# Altium PCB PCB1.pcbdoc
Units mm, origin at the board's own origin, x right, y up, seen from the top; angles counter-clockwise.
Board outline 107.47 x 61.72 mm, 4 copper layers (Clean Signal Layer, Plain Ground, Power Layer, Bottom Layer), stack 0.603 mm thick; 116 components, 91 nets, 447 pads, 4 vias.
Unrouted connection lines stored in the file: 293.
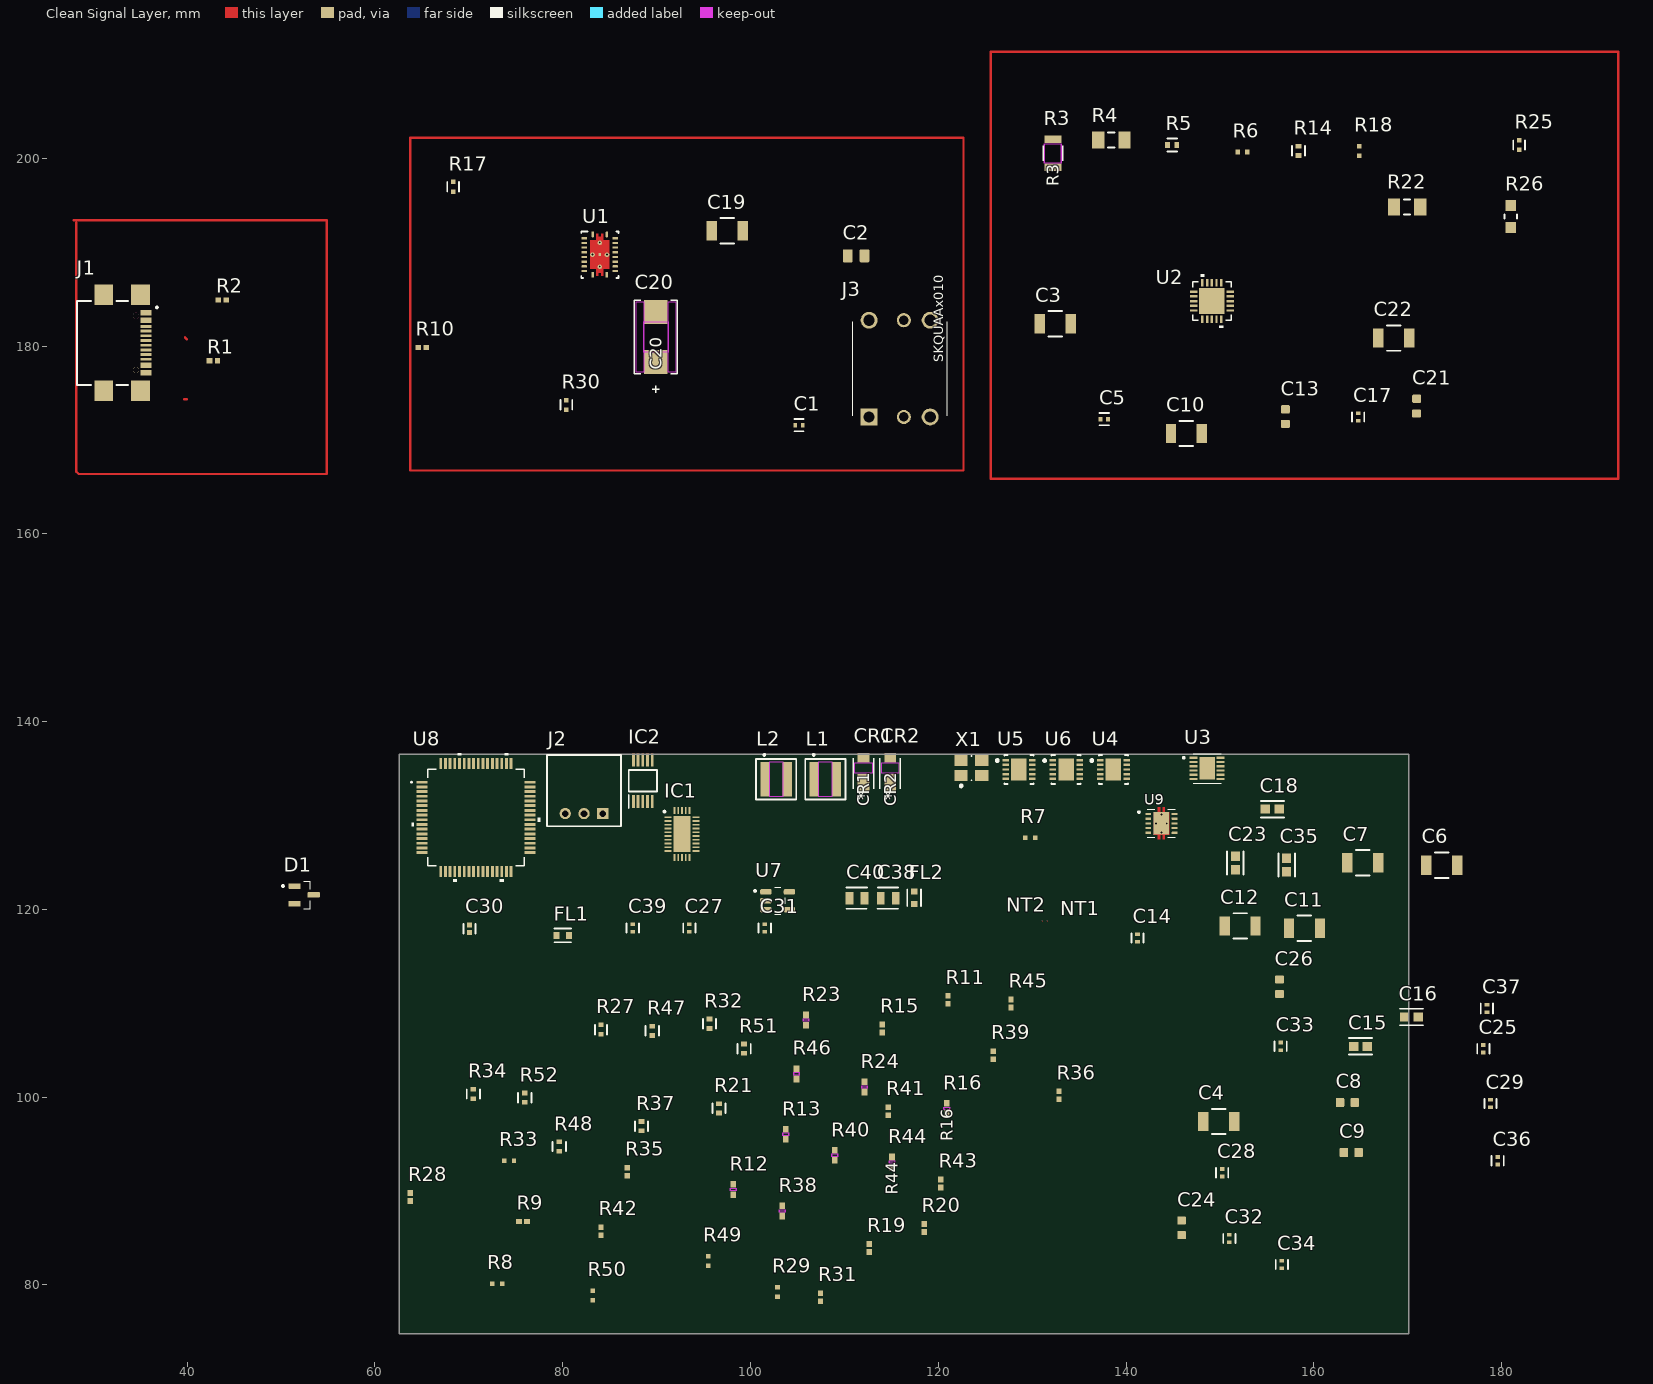
[diagram p0: Clean Signal Layer view]
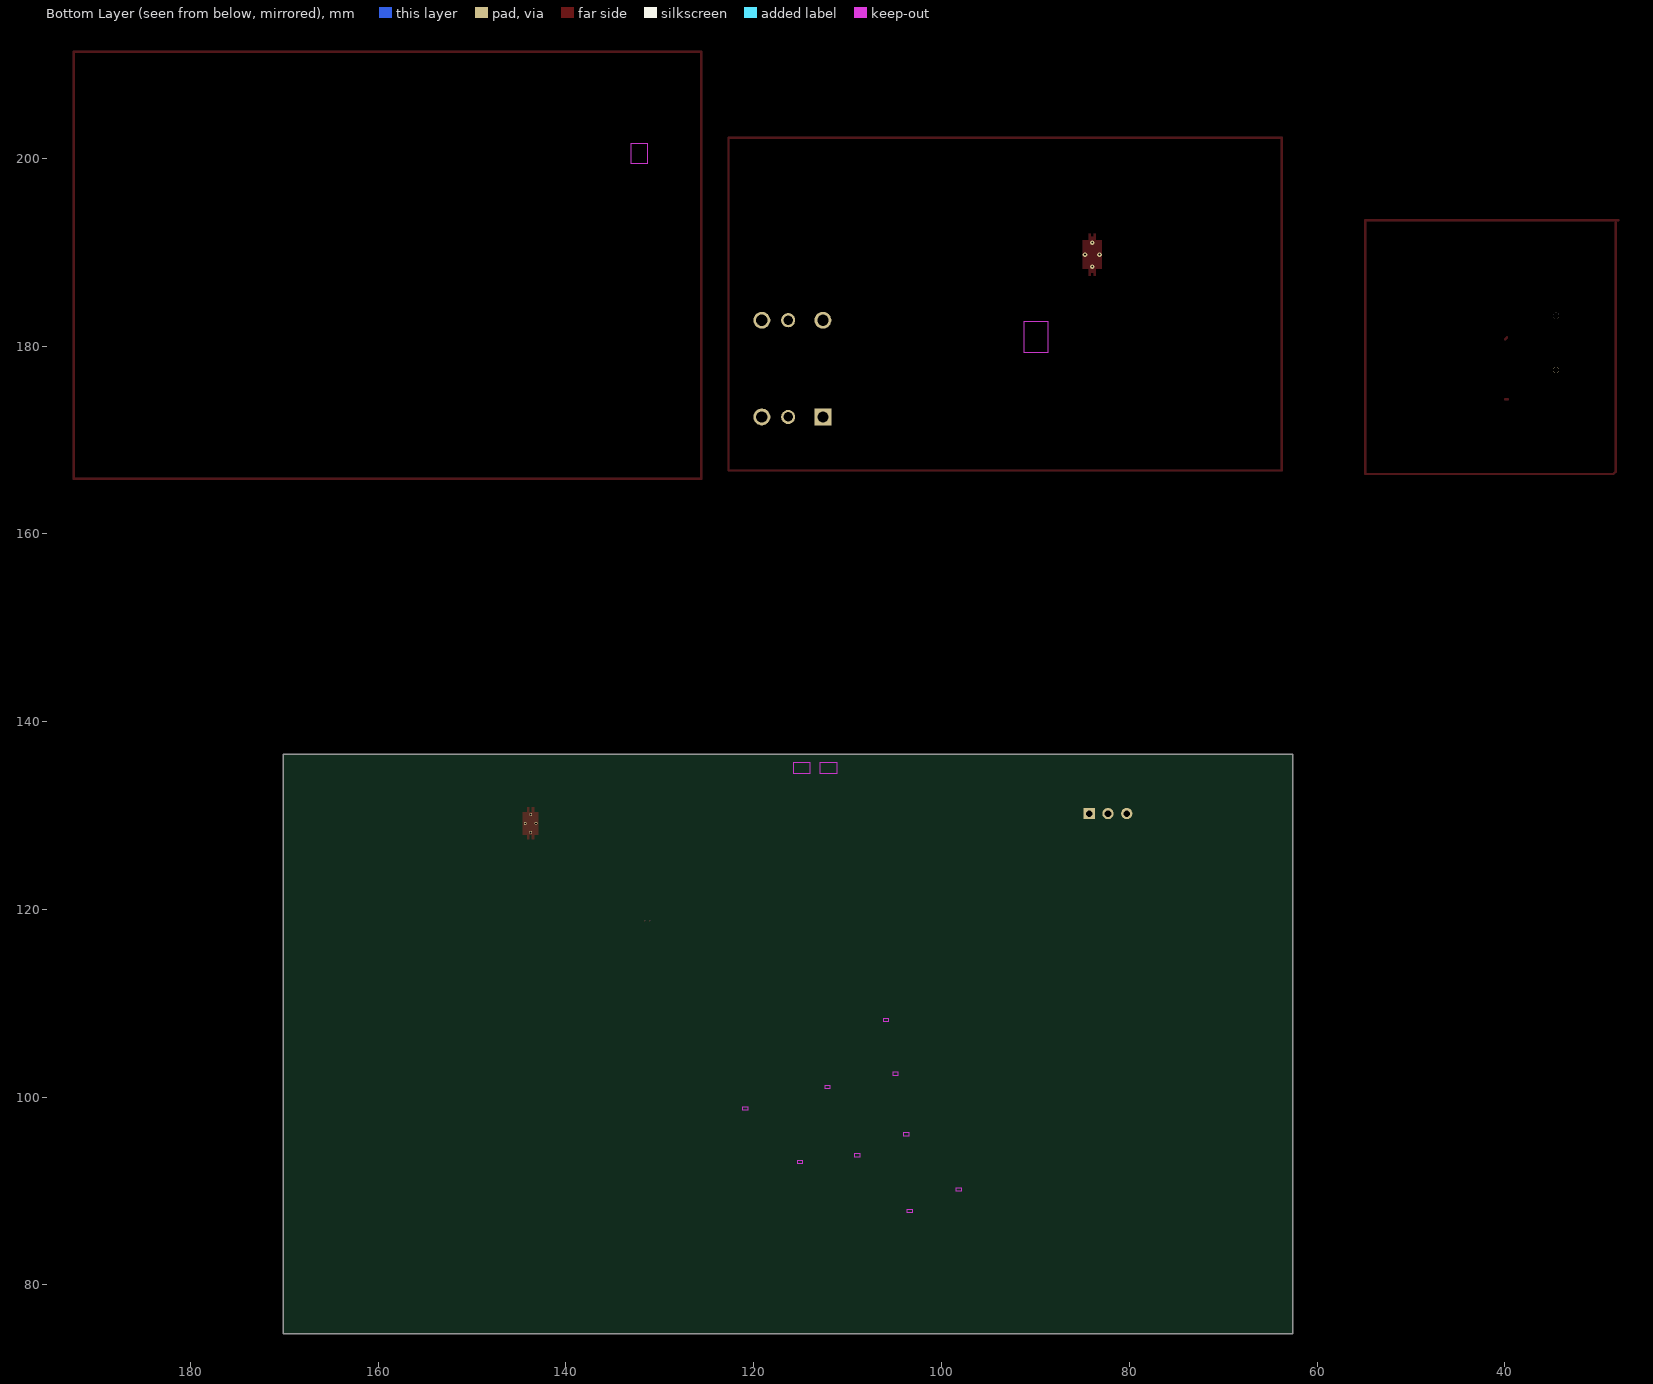
[diagram p1: Bottom Layer view, seen from below]

## Layer stack, top to bottom
Top Solder Mask Layer: solder mask 0.0102, Solder Resist, Dk 3.5
Clean Signal Layer: signal copper 0.035
Dielectric 1: prepreg 0.0711, PP-006, Dk 4.1
Plain Ground: signal copper 0.0356
Dielectric1: dielectric 0.32, FR-4, Dk 4.8
Power Layer: signal copper 0.0356
Dielectric 2: prepreg 0.0711, PP-006, Dk 4.1
Bottom Layer: signal copper 0.035
Bottom Solder Mask Layer: solder mask 0.0102, Solder Resist, Dk 3.5

## Board outline
170.085,74.803 62.611,74.803 62.611,136.525 170.085,136.525

## Design rules (kind name [scope] priority, off if disabled: settings)
BoardOutlineClearance copperThickness1oz_1 [All] p1: gap=0.254 ignorepadtopadclearanceinfootprint=FALSE except(0: Arc-SplitContinuation Track-SplitContinuation SMDPad-SplitContinuation THPad-SplitContinuation Via-SplitContinuation Fill-SplitContinuation Poly-SplitContinuation Region-SplitContinuation Text-SplitContinuation; 0.152: Track-CutoutEdge SMDPad-CutoutEdge THPad-CutoutEdge Via-CutoutEdge Region-CutoutEdge; 0.3: Track-OutlineEdge SMDPad-OutlineEdge THPad-OutlineEdge Via-OutlineEdge Fill-OutlineEdge Fill-CutoutEdge Poly-OutlineEdge Region-OutlineEdge Text-OutlineEdge)
BoardOutlineClearance copperThickness2oz_1 [All] p2: gap=0.254 ignorepadtopadclearanceinfootprint=FALSE except(0: Arc-SplitContinuation Track-SplitContinuation SMDPad-SplitContinuation THPad-SplitContinuation Via-SplitContinuation Fill-SplitContinuation Poly-SplitContinuation Region-SplitContinuation Text-SplitContinuation; 0.152: Track-CutoutEdge SMDPad-CutoutEdge THPad-CutoutEdge Via-CutoutEdge Region-CutoutEdge; 0.3: Track-OutlineEdge SMDPad-OutlineEdge THPad-OutlineEdge Via-OutlineEdge Fill-OutlineEdge Fill-CutoutEdge Poly-OutlineEdge Region-OutlineEdge Text-OutlineEdge)
Clearance copperThickness1oz [(InNet('$1N2134') OR InNet('$1N1996') OR InNet('$1N2969') OR InNet('$1N2881') OR InNet('$1N1990') OR InNet('$1N2091') OR InNet('$1N2099') OR InNet('$1N2070') OR InNet('$1N2078') OR InNet('$1N2237') OR InNet('$1N2887'))] p1: gap=0.152 ignorepadtopadclearanceinfootprint=FALSE except(0.102: Track-Track; 0.175: Track-Hole SMDPad-Hole THPad-Hole Via-Hole Fill-Hole Poly-Hole Region-Hole Text-Hole; 0.178: Arc-Arc Arc-Track Arc-SMDPad Arc-THPad Arc-Via Arc-Fill Arc-Poly Arc-Region Arc-Text Arc-Hole; 0.3: Track-Fill Fill-Region)
Clearance copperThickness2oz [All] p2: gap=0.152 ignorepadtopadclearanceinfootprint=FALSE except(0.175: Track-Hole SMDPad-Hole THPad-Hole Via-Hole Fill-Hole Poly-Hole Region-Hole Text-Hole; 0.178: Arc-Arc Arc-Track Arc-SMDPad Arc-THPad Arc-Via Arc-Fill Arc-Poly Arc-Region Arc-Text Arc-Hole; 0.203: Track-Track; 0.3: Track-Fill Fill-Region)
DiffPairsRouting differentialPair [All] p1: maxlimit=0.152 minlimit=0.152 mostfreqgap=0.152 toplayer_minwidth=0.127 toplayer_maxwidth=2.54 toplayer_prefwidth=0.254 midlayer1_minwidth=0.127 midlayer1_maxwidth=2.54 midlayer1_prefwidth=0.254 midlayer2_minwidth=0.127 midlayer2_maxwidth=2.54 midlayer2_prefwidth=0.254 bottomlayer_minwidth=0.127 bottomlayer_maxwidth=2.54 bottomlayer_prefwidth=0.254 maxuncoupledlength=0.254
PasteMaskExpansion pasteMaskExpansion [All] p1: expansion=0
PlaneConnect innerPlane [All] p1: planeconnectstyle=Relief reliefexpansion=0.508 reliefentries=4 reliefconductorwidth=0.254 reliefairgap=0.254
PolygonConnect copperRegion [All] p1: connectstyle=Relief reliefconductorwidth=0.254 reliefentries=4 polygonreliefangle="90 Angle" airgapwidth=0.254
RoutingVias viaSize [All] p1: holewidth=0.305 width=0.61 viastyle="Through Hole" minholewidth=0.3 minwidth=0.5 maxholewidth=6.3 maxwidth=10
SolderMaskExpansion solderMaskExpansion [All] p1: expansion=0.051 istentingtop=FALSE useseparateexpansions=TRUE expansionbottom=0.051 istentingbottom=FALSE
SupplyNets "Schematic Supply Nets" [InNet('GND')] p1: voltage=0.000
Width copperThickness1oz_2 [All] p1: maxlimit=2.54 minlimit=0.127 preferedwidth=0.254
Width copperThickness2oz_2 [All] p2: maxlimit=2.54 minlimit=0.203 preferedwidth=0.254
27 further rules are at their usual default settings.

## Components (designator, comment, footprint, x,y, rotation, side; value= is the part's Value field where it differs from the comment)
C1 "0.1μF" FP-GRM155-0_05-MFG 105.156,171.577 r0 top
C2 "10μF" CAPC2012X145N 111.251,189.611 r0 top
C3 "Capacitor" FP-GRM32-MFG 132.461,182.372 r0 top
C4 "Capacitor" FP-GRM32-MFG 149.859,97.409 r0 top
C5 "Capacitor" FP-GRM155-0_05-MFG 137.687,172.212 r0 top
C6 "Capacitor" FP-GRM32-MFG 173.609,124.714 r0 top
C7 "Capacitor" FP-GRM32-MFG 165.226,124.968 r0 top
C8 "Capacitor" CAPC1608X95N 163.576,99.441 r0 top
C9 "Capacitor" CAPC1608X95N 163.98,94.107 r0 top
C10 "Capacitor" FP-GRM32-MFG 146.43,170.688 r0 top
C11 "Capacitor" FP-GRM32-MFG 159.004,117.983 r0 top
C12 "Capacitor" FP-GRM32-MFG 152.146,118.237 r0 top
C13 "Capacitor" CAPC1608X90N 156.972,172.484 r90 top
C14 "0.1μF" FP-GRM155-0_05-MFG 141.224,116.948 r90 top
C15 "Capacitor" FP-CL10-IPC_B 164.973,105.41 r0 top
C16 "Capacitor" FP-CL10-IPC_B 170.382,108.535 r0 top
C17 "Capacitor" FP-GRM155-0_05-MFG 164.719,172.447 r90 top
C18 "Capacitor" FP-CL10-IPC_B 155.575,130.683 r0 top
C19 "Capacitor" FP-GRM32-MFG 97.536,192.278 r0 top
C20 "33μF" CAPMP7.6X4.3_3.1N_KEM 89.916,180.975 r90 top
C21 "Capacitor" CAPC1608X90N 170.942,173.609 r90 top
C22 "Capacitor" FP-GRM32-MFG 168.529,180.848 r0 top
C23 "Capacitor" FP-CL10-IPC_B 151.638,124.932 r90 top
C24 "Capacitor" CAPC1608X90N 145.923,86.088 r90 top
C25 "Capacitor" FP-GCM155-0_05-MFG 178.054,105.156 r90 top
C26 "Capacitor" CAPC1608X90N 156.337,111.76 r90 top
C27 "0.1μF" FP-GRM155-0_05-MFG 93.487,118.026 r90 top
C28 "Capacitor" FP-GCM155-0_05-MFG 150.241,91.948 r90 top
C29 "Capacitor" FP-GRM155-0_05-MFG 178.816,99.314 r90 top
C30 "1μF" FP-C0402C-BB-MFG 70.079,117.926 r90 top
C31 "0.1μF" FP-GRM155-0_05-MFG 101.519,118.026 r90 top
C32 "Capacitor" FP-GRM155-0_05-MFG 151.003,84.944 r90 top
C33 "Capacitor" FP-GRM155-0_05-MFG 156.464,105.41 r90 top
C34 "Capacitor" FP-GRM155-0_05-MFG 156.591,82.169 r90 top
C35 "Capacitor" FP-CL10-IPC_B 157.099,124.714 r90 top
C36 "Capacitor" FP-GCM155-0_05-MFG 179.578,93.218 r90 top
C37 "Capacitor" FP-GCM155-0_05-MFG 178.435,109.455 r90 top
C38 "10μF" FP-CL21B106KOQNNNE-MFG 114.675,121.209 r0 top
C39 "0.1μF" FP-GRM155-0_05-MFG 87.463,118.026 r90 top
C40 "10μF" FP-CL21B106KOQNNNE-MFG 111.342,121.209 r0 top
CR1 "DFLS240-7" POWERDI123_DIO 112.036,134.493 r90 top
CR2 "DFLS240-7" POWERDI123_DIO 114.881,134.493 r90 top
D1 "BAT54C_RF" SOT95P237X112-3N 52.451,121.539 r0 top
FL1 "BLM18HE152SN1D" FP-BLM18-0_15-t0_8-MFG 80.01,117.221 r0 top
FL2 "BLM18HE152SN1D" FP-BLM18-0_15-t0_8-MFG 117.42,121.234 r90 top
IC1 "ES9038Q2M" QFN40P300X500X80-31N-D 92.71,128.016 r0 top
IC2 "Si5351A-B-GT" SOP50P490X110-10N 88.528,133.701 r90 top
J1 "USB4110GFA" GCT_USB4110GFA 34.544,180.34 r270 top
J2 "S3B-PH-K-S(LF)(SN)" FP-S3B-PH-K-S_LF_SN-MFG 82.27,132.652 r0 top
J3 "SKQUAAA010" SKQUAAA010 119.132,172.453 r90 top
L1 "Inductor" WE-MAPI_4030 107.985,133.852 r0 top
L2 "Inductor" WE-MAPI_4030 102.727,133.852 r0 top
NT1 "NT" NETTIE_SMD 131.053,118.928 r90 top net-tie
NT2 "NT" NETTIE_SMD 131.587,118.928 r90 top net-tie
R1 "Resistor" RESC1005X40X25NL05T10#1 42.799,178.435 r180 top
R2 "Resistor" RESC1005X40X25NL05T10#2 43.732,184.912 r180 top
R3 "Resistor" RES_RS73F_2B_KOA 132.207,200.533 r90 top
R4 "Resistor" RESC3216X70X50NL20T25 138.43,201.93 r0 top
R5 "Resistor" FP-RT0402-MFG 144.915,201.422 r0 top
R6 "Resistor" ERA2AED122X 152.4,200.66 r0 top
R7 "Resistor" ERA2AED122X 129.794,127.635 r0 top
R8 "Resistor" ERA2AED122X 73.029,80.137 r0 top
R9 "Resistor" RESC1005X40X25NL05T10#2 75.775,86.741 r0 top
R10 "Resistor" RESC1005X40X25NL05T10#2 65.024,179.832 r0 top
R11 "Resistor" RESC1005X40X25NL05T10#2 121.031,110.363 r90 top
R12 "Resistor" 0402_PAN 98.171,90.17 r90 top
R13 "Resistor" 0402_PAN 103.759,96.05 r90 top
R14 "Resistor" FP-RT0402-MFG 158.369,200.795 r90 top
R15 "Resistor" RESC1005X40X25NL10T10 114.046,107.315 r90 top
R16 "Resistor" 0402_PAN 120.904,98.806 r90 top
R17 "Resistor" FP-ERA2A-MFG 68.326,196.973 r90 top
R18 "Resistor" ERA2AED122X 164.846,200.787 r90 top
R19 "Resistor" RESC1005X40X25NL10T10 112.649,83.947 r90 top
R20 "Resistor" RESC1005X40X25NL10T10 118.491,86.062 r90 top
R21 "Resistor" FP-RT0402-MFG 96.647,98.814 r90 top
R22 "Resistor" RESC3216X70X50NL20T25 169.926,194.818 r0 top
R23 "Resistor" 0402_PAN 105.918,108.204 r90 top
R24 "Resistor" 0402_PAN 112.141,101.092 r90 top
R25 "Resistor" FP-ERA2A-MFG 181.864,201.418 r90 top
R26 "Resistor" FP-ERA6A-MFG 180.975,193.802 r90 top
R27 "Resistor" FP-ERA2A-MFG 84.074,107.193 r90 top
R28 "Res_0603" RESC1005X40X25NL05T10#2 63.754,89.364 r90 top
R29 "Resistor" ERA2AED122X 102.87,79.248 r90 top
R30 "Resistor" FP-ERA2A-MFG 80.391,173.736 r90 top
R31 "Resistor" RESC1005X40X25NL05T10#2 107.442,78.696 r90 top
R32 "Resistor" FP-RT0402-MFG 95.631,107.823 r90 top
R33 "Resistor" ERA2AED122X 74.299,93.218 r0 top
R34 "Resistor" FP-RT0402-MFG 70.485,100.338 r90 top
R35 "Resistor" RESC1005X40X25NL05T10#2 86.868,92.075 r90 top
R36 "Resistor" RESC1005X40X25NL05T10#2 132.842,100.203 r90 top
R37 "Resistor" FP-RT0402-MFG 88.392,96.909 r90 top
R38 "Resistor" 0402_PAN 103.378,87.884 r90 top
R39 "Resistor" RESC1005X40X25NL05T10#2 125.857,104.477 r90 top
R40 "Resistor" 0402_PAN 108.966,93.815 r90 top
R41 "Resistor" RESC1005X40X25NL05T10#2 114.681,98.508 r90 top
R42 "Resistor" RESC1005X40X25NL05T10#2 84.074,85.725 r90 top
R43 "Resistor" RESC1005X40X25NL05T10#2 120.269,90.805 r90 top
R44 "Resistor" 0402_PAN 115.062,93.091 r90 top
R45 "Resistor" RESC1005X40X25NL05T10#2 127.762,109.982 r90 top
R46 "Resistor" 0402_PAN 104.902,102.489 r90 top
R47 "Resistor" FP-RT0402-MFG 89.535,107.069 r90 top
R48 "Resistor" FP-RT0402-MFG 79.629,94.742 r90 top
R49 "Resistor" ERA2AED122X 95.504,82.55 r90 top
R50 "Resistor" ERA2AED122X 83.185,78.867 r90 top
R51 "Resistor" FP-RT0402-0_35-MFG 99.314,105.164 r90 top
R52 "Resistor" FP-RT0402-0_35-MFG 75.946,99.949 r90 top
U1 "BQ24070RHLR" RHL0020A_V 83.947,189.738 r0 top
U2 "ADP5070ACPZ" CP-20-8_ADI 149.136,184.793 r0 top
U3 "LT3094HDD#TRPBF" SON45P300X300X80-13N 148.638,135.018 r0 top
U4 "LT3045IDD#PBF" FP-DD-10-05-08-1699-MFG 138.657,134.902 r0 top
U5 "LT3045IDD#PBF" FP-DD-10-05-08-1699-MFG 128.591,134.902 r0 top
U6 "LT3045IDD#PBF" FP-DD-10-05-08-1699-MFG 133.624,134.902 r0 top
U7 "TLV75533PDBVR" SOT95P280X145-5N 102.892,120.921 r0 top
U8 "STM32F446RET6" LQFP64-10x10mm 70.757,129.797 r0 top
U9 "OPA1622IDRCR" IC_OPA1622IDRCR 143.764,129.159 r0 top
X1 "Crystal" FP-NX3225SA-MFG 123.533,135.052 r0 top

## Footprints (in the part's own frame and the unit in brackets; to place one, negate y for a bottom-side part, rotate by r counter-clockwise, add the part's x,y. Pads: shape width x height; smd on the part's side, far side on the other; paste and mask are expansions set on the pad)
0402_PAN [mil]
  rect 28x24 smd paste+0 mask+0: 1(-21.5,0) 2(21.5,0)
  Clean Signal Layer keep-out region: -5.5,-10 -5.5,10 5.5,10 5.5,-10
  Board Outline Layer region: -5.5,-12 -5.5,12 5.5,12 5.5,-12
  body extent -21,-12 21,12, height 16
CAPC1608X90N [mm]
  rrect25% 0.87x0.93 smd: 1(-0.78,0) 2(0.78,0)
CAPC1608X95N [mm]
  rrect25% 0.9x0.97 smd: 1(-0.785,0) 2(0.785,0)
  body extent -0.8,-0.4 0.8,0.4, height 0.95
CAPC2012X145N [mm]
  rrect25% 1.05x1.38 smd paste+0 mask+0.102: 1(-0.888,0) 2(0.888,0)
  body extent -1,-0.63 1,0.63, height 1.45
CAPMP7.6X4.3_3.1N_KEM [mm]
  rect 2.56x2.5 smd paste+0 mask+0: 1(-2.672,0) 2(2.672,0)
  Clean Signal Layer keep-out region: -3.749,-2.099 -3.749,-1.301 3.749,-1.301 3.749,-2.099
  Clean Signal Layer keep-out region: -3.749,1.301 -3.749,2.099 3.749,2.099 3.749,1.301
  Clean Signal Layer keep-out region: -1.641,-1.301 -1.641,1.301 1.641,1.301 1.641,-1.301
  Board Outline Layer region: -1.641,-1.301 -1.641,1.301 1.641,1.301 1.641,-1.301
  silkscreen extent -5.95,-2.28 3.93,2.28, body extent -3.8,-2.15 3.8,2.15, height 3.15
CP-20-8_ADI [mil]
  rect 32x10 smd paste+0 mask+0: 1(-76.5,39.37) 2(-76.5,19.69) 3(-76.5,0) 4(-76.5,-19.68) 5(-76.5,-39.37) 11(76.5,-39.37) 12(76.5,-19.68) 13(76.5,0) 14(76.5,19.69) 15(76.5,39.37)
  rect 10x32 smd paste+0 mask+0: 6(-39.37,-76.5) 7(-19.68,-76.5) 8(0,-76.5) 9(19.69,-76.5) 10(39.37,-76.5) 16(39.37,76.5) 17(19.69,76.5) 18(0,76.5) 19(-19.68,76.5) 20(-39.37,76.5)
  rect 108x108 smd paste-54 mask+0: 21(0,0)
  silkscreen extent -80,-112 80,112, body extent -81,-81 81,81, height 32
ERA2AED122X [mm]
  rect 0.475x0.5 smd: 1(-0.512,0) 2(0.512,0)
  body extent -0.5,-0.25 0.5,0.25, height 0.35
FP-BLM18-0_15-t0_8-MFG [mm]
  rect 0.65x0.7 smd paste+0 mask+0: 1(-0.675,0) 2(0.675,0)
  silkscreen extent -0.87,-0.73 0.88,0.73, body extent -1.1,-0.58 1.1,0.58, height 0.25
FP-C0402C-BB-MFG [mm]
  rect 0.52x0.52 smd paste+0 mask+0: 1(-0.4,0) 2(0.4,0)
  silkscreen extent -0.5,-0.64 0.5,0.63, body extent -0.8,-0.4 0.8,0.4, height 0.25
FP-CL10-IPC_B [mm]
  rect 1.006x0.958 smd paste+0 mask+0: 1(-0.726,0) 2(0.726,0)
  silkscreen extent -1.23,-0.88 1.23,0.88, body extent -1.48,-0.73 1.48,0.73, height 0.25
FP-CL21B106KOQNNNE-MFG [mm]
  rect 0.825x1.325 smd paste+0 mask+0: 1(-0.8,0) 2(0.8,0)
  silkscreen extent -1.13,-1.14 1.05,1.13, body extent -1.31,-0.8 1.31,0.8, height 0.25
FP-DD-10-05-08-1699-MFG [mm]
  rect 0.7x0.25 smd paste+0 mask+0: 1(-1.425,1) 2(-1.425,0.5) 3(-1.425,0) 4(-1.425,-0.5) 5(-1.425,-1) 6(1.425,-1) 7(1.425,-0.5) 8(1.425,0) 9(1.425,0.5) 10(1.425,1)
  rect 1.65x2.38 smd paste+0 mask+0: 11(0,0)
  silkscreen extent -2.42,-1.55 1.55,1.55, body extent -1.88,-1.65 1.88,1.65, height 0.25
FP-ERA2A-MFG [mm]
  rect 0.475x0.5 smd paste+0 mask+0: 1(-0.512,0) 2(0.512,0)
  silkscreen extent -0.5,-0.62 0.5,0.62, body extent -0.85,-0.4 0.85,0.4, height 0.25
FP-ERA6A-MFG [mm]
  rect 1.15x1.15 smd paste+0 mask+0: 1(-1.175,0) 2(1.175,0)
  silkscreen extent -0.23,-0.67 0.22,0.68, body extent -1.85,-0.77 1.85,0.77, height 0.25
FP-GCM155-0_05-MFG [mm]
  rect 0.4x0.5 smd paste+0 mask+0: 1(-0.4,0) 2(0.4,0)
  silkscreen extent -0.53,-0.65 0.52,0.65, body extent -0.7,-0.38 0.7,0.38, height 0.25
FP-GRM32-MFG [mm]
  rect 1.1x2.05 smd paste+0 mask+0: 1(-1.65,0) 2(1.65,0)
  silkscreen extent -0.72,-1.35 0.72,1.35, body extent -2.3,-1.45 2.3,1.45, height 0.25
FP-GRM155-0_05-MFG [mm]
  rect 0.4x0.5 smd paste+0 mask+0: 1(-0.4,0) 2(0.4,0)
  silkscreen extent -0.5,-0.65 0.5,0.65, body extent -0.7,-0.38 0.7,0.38, height 0.25
FP-NX3225SA-MFG [mm]
  rect 1.4x1.2 smd paste+0 mask+0: 1(-1.1,-0.8) 2(1.1,-0.8) 3(1.1,0.8) 4(-1.1,0.8)
  silkscreen extent -1.22,-2.02 0.03,1.3, body extent -1.9,-1.5 1.9,1.5, height 0.25
FP-RT0402-0_35-MFG [mm]
  rect 0.5x0.6 smd paste+0 mask+0: 1(-0.5,0) 2(0.5,0)
  silkscreen extent -0.5,-0.71 0.5,0.7, body extent -0.85,-0.4 0.85,0.4, height 0.25
FP-RT0402-MFG [mm]
  rect 0.5x0.6 smd paste+0 mask+0: 1(-0.5,0) 2(0.5,0)
  silkscreen extent -0.5,-0.71 0.5,0.7, body extent -0.85,-0.4 0.85,0.4, height 0.25
FP-S3B-PH-K-S_LF_SN-MFG [mm]
  rect 1.2x1.2 hole 0.7 paste-2539.97 mask+0: 1(2,-2.45)
  round 1.2 hole 0.7 paste-2539.97 mask+0: 2(0,-2.45) 3(-2,-2.45)
  silkscreen extent -3.95,-3.8 3.95,3.8, body extent -4.05,-3.9 4.05,3.9, height 0.25
GCT_USB4110GFA [mm]
  rect 0.6x1.15 smd: A1/B12(-3.2,1.075) A4/B9(-2.4,1.075) B1/A12(3.2,1.075) B4/A9(2.4,1.075)
  rect 0.3x1.15 smd: A5(-1.25,1.075) A6(-0.25,1.075) A7(0.25,1.075) A8(1.25,1.075) B5(1.75,1.075) B6(0.75,1.075) B7(-0.75,1.075) B8(-1.75,1.075)
  rect 2.18x2 smd: S1(-5.11,0.5) S2(5.11,0.5) S3(-5.11,-3.43) S4(5.11,-3.43)
  round 0.65 hole 0.65 unplated: ""(-2.89,0) ""(2.89,0)
  silkscreen extent -4.47,-6.28 4.47,2.33, body extent -5.65,-6.28 5.65,1.42, height 3.26
IC_OPA1622IDRCR [mm]
  rrect25% 0.6x0.24 smd mask+0: 1(-1.4,1) 2(-1.4,0.5) 3(-1.4,0) 4(-1.4,-0.5) 5(-1.4,-1) 6(1.4,-1) 7(1.4,-0.5) 8(1.4,0) 9(1.4,0.5) 10(1.4,1)
  rrect5% 1.65x2.4 smd paste-2 mask+0: 11(0,0)
  round 0.3 hole 0.2 mask+0: 12(0,0.95) 13(-0.575,0) 14(0.575,0) 15(0,-0.95)
  Clean Signal Layer region: 0.375,1.2 0.825,1.2 0.825,-1.2 0.375,-1.2 0.375,-1.7 0.125,-1.7 0.125,-1.2 -0.125,-1.2 -0.125,-1.7 -0.375,-1.7 -0.375,-1.2 -0.825,-1.2 -0.825,1.2 -0.375,1.2 -0.375,1.7 -0.125,1.7 -0.125,1.2 0.125,1.2 0.125,1.7 0.375,1.7
  silkscreen extent -2.49,-1.5 1.5,1.5, body extent -1.5,-1.5 1.5,1.5, height 1
LQFP64-10x10mm [mil]
  rect 47x12 smd paste+0 mask+0: 1(-226.38,147.64) 2(-226.38,127.95) 3(-226.38,108.27) 4(-226.38,88.58) 5(-226.38,68.9) 6(-226.38,49.21) 7(-226.38,29.53) 8(-226.38,9.84) 9(-226.38,-9.84) 10(-226.38,-29.53) 11(-226.38,-49.21) 12(-226.38,-68.9) 13(-226.38,-88.58) 14(-226.38,-108.27) 15(-226.38,-127.95) 16(-226.38,-147.64) 33(226.38,-147.64) 34(226.38,-127.95) 35(226.38,-108.27) 36(226.38,-88.58) 37(226.38,-68.9) 38(226.38,-49.21) 39(226.38,-29.53) 40(226.38,-9.84) 41(226.38,9.84) 42(226.38,29.53) 43(226.38,49.21) 44(226.38,68.9) 45(226.38,88.58) 46(226.38,108.27) 47(226.38,127.95) 48(226.38,147.64)
  rect 12x47 smd paste+0 mask+0: 17(-147.64,-226.38) 18(-127.95,-226.38) 19(-108.27,-226.38) 20(-88.58,-226.38) 21(-68.9,-226.38) 22(-49.21,-226.38) 23(-29.53,-226.38) 24(-9.84,-226.38) 25(9.84,-226.38) 26(29.53,-226.38) 27(49.21,-226.38) 28(68.9,-226.38) 29(88.58,-226.38) 30(108.27,-226.38) 31(127.95,-226.38) 32(147.64,-226.38) 49(147.64,226.38) 50(127.95,226.38) 51(108.27,226.38) 52(88.58,226.38) 53(68.9,226.38) 54(49.21,226.38) 55(29.53,226.38) 56(9.84,226.38) 57(-9.84,226.38) 58(-29.53,226.38) 59(-49.21,226.38) 60(-68.9,226.38) 61(-88.58,226.38) 62(-108.27,226.38) 63(-127.95,226.38) 64(-147.64,226.38)
  silkscreen extent -273,-270 270,270, body extent -236,-236 236,236, height 63
NETTIE_SMD [mil]
  rect 1x1 smd mask-10: 0(-10,0)
  rect 1x1 hole 0.5 mask-10: 1(-4.5,0)
  Clean Signal Layer region: -9.74,-0.35 -4.74,-0.35 -4.74,0.35 -9.74,0.35
POWERDI123_DIO [mil]
  rect 83x49 smd paste+0 mask+0: 1(-43.5,0)
  rect 39x49 smd paste+0 mask+0: 2(65.5,0)
  Clean Signal Layer keep-out region: 0,-36 0,36 44,36 44,-36
  Board Outline Layer region: 0,-36 0,36 44,36 44,-36
  silkscreen extent -64,-43 64,43, body extent -77,-38 77,38, height 32
QFN40P300X500X80-31N-D [mm]
  rect 0.75x0.2 smd: 1(-1.5,1.8) 2(-1.5,1.4) 3(-1.5,1) 4(-1.5,0.6) 5(-1.5,0.2) 6(-1.5,-0.2) 7(-1.5,-0.6) 8(-1.5,-1) 9(-1.5,-1.4) 10(-1.5,-1.8) 16(1.5,-1.8) 17(1.5,-1.4) 18(1.5,-1) 19(1.5,-0.6) 20(1.5,-0.2) 21(1.5,0.2) 22(1.5,0.6) 23(1.5,1) 24(1.5,1.4) 25(1.5,1.8)
  rect 0.2x0.75 smd: 11(-0.8,-2.5) 12(-0.4,-2.5) 13(0,-2.5) 14(0.4,-2.5) 15(0.8,-2.5) 26(0.8,2.5) 27(0.4,2.5) 28(0,2.5) 29(-0.4,2.5) 30(-0.8,2.5)
  rect 1.85x3.85 smd: 31(0,0)
  silkscreen extent -1.97,2.3 -1.78,2.5, body extent -1.55,-2.55 1.55,2.55, height 0.8
RES_RS73F_2B_KOA [mil]
  rect 32x71 smd paste+0 mask+0: 1(-59,0) 2(59,0)
  Clean Signal Layer keep-out region: -41,-33.5 -41,33.5 41,33.5 41,-33.5
  Board Outline Layer region: -41,-35.5 -41,35.5 41,35.5 41,-35.5
  silkscreen extent -31,-40 31,41, body extent -67,-36 67,36, height 28
RESC1005X40X25NL05T10#1 [mm] "Chip Resistor, 2-Leads, Body 1.00x0.50mm, IPC Medium Density"
  rect 0.55x0.6 smd: 1(-0.425,0)
  rect 0.6x0.55 smd: 2(0.425,0)
  body extent -0.53,-0.27 0.53,0.28, height 0.4
RESC1005X40X25NL05T10#2 [mm] "Chip Resistor, 2-Leads, Body 1.00x0.50mm, IPC Medium Density"
  rect 0.6x0.55 smd: 1(-0.425,0) 2(0.425,0)
  body extent -0.53,-0.27 0.53,0.28, height 0.4
RESC1005X40X25NL10T10 [mm] "Chip Resistor, 2-Leads, Body 1.00x0.50mm, IPC Medium Density"
  rect 0.65x0.6 smd: 1(-0.425,0) 2(0.425,0)
  body extent -0.55,-0.3 0.55,0.3, height 0.4
RESC3216X70X50NL20T25 [mm] "Chip Resistor, 2-Leads, Body 3.20x1.60mm, IPC Medium Density"
  rect 1.3x1.8 smd: 1(-1.4,0) 2(1.4,0)
  silkscreen extent -0.35,-0.8 0.35,0.8, body extent -1.7,-0.9 1.7,0.9, height 0.7
RHL0020A_V [mm] "QFN, 20-Leads, Body 4.5x3.5mm, Pitch 0.5mm, Thermal Pad 3.05x2.05mm, TI Recommended"
  rrect42% 0.24x0.6 smd: 1(-0.75,2.15) 10(-0.75,-2.15) 11(0.75,-2.15) 20(0.75,2.15)
  rrect42% 0.6x0.24 smd: 2(-1.65,1.75) 3(-1.65,1.25) 4(-1.65,0.75) 5(-1.65,0.25) 6(-1.65,-0.25) 7(-1.65,-0.75) 8(-1.65,-1.25) 9(-1.65,-1.75) 12(1.65,-1.75) 13(1.65,-1.25) 14(1.65,-0.75) 15(1.65,-0.25) 16(1.65,0.25) 17(1.65,0.75) 18(1.65,1.25) 19(1.65,1.75)
  rrect33% 0.3x0.3 smd paste-0.15 mask+0: 21(0,0)
  Clean Signal Layer region: 0.16,2.25 0.16,1.925 -0.16,1.925 -0.16,2.25 -0.39,2.25 -0.39,1.525 -1.025,1.525 -1.025,-1.525 -0.39,-1.525 -0.39,-2.25 -0.16,-2.25 -0.16,-1.925 0.16,-1.925 0.16,-2.25 0.39,-2.25 0.39,-1.525 1.025,-1.525 1.025,1.525 0.39,1.525 0.39,2.25
  silkscreen extent -1.98,-2.47 1.98,2.47, body extent -1.82,-2.33 1.83,2.32, height 1
SKQUAAA010 [mm]
  rect 1.8x1.8 hole 1.2: 1(0,6.5)
  round 1.508 hole 1: 2(0,2.8) 5(10.3,2.8)
  round 1.8 hole 1.2: 3(0,0) 4(10.3,0) 6(10.3,6.5)
  silkscreen extent 0.15,-1.8 10.15,8.25
SON45P300X300X80-13N [mm]
  rrect25% 0.86x0.25 smd: 1(-1.435,1.125) 2(-1.435,0.675) 3(-1.435,0.225) 4(-1.435,-0.225) 5(-1.435,-0.675) 6(-1.435,-1.125) 7(1.435,-1.125) 8(1.435,-0.675) 9(1.435,-0.225) 10(1.435,0.225) 11(1.435,0.675) 12(1.435,1.125)
  rect 1.65x2.38 smd paste-2: 13(0,0)
  silkscreen extent -2.59,-1.57 1.5,1.57, body extent -1.5,-1.5 1.5,1.5, height 0.8
SOP50P490X110-10N [mm]
  rect 1.4x0.3 smd: 1(-2.2,1) 2(-2.2,0.5) 3(-2.2,0) 4(-2.2,-0.5) 5(-2.2,-1) 6(2.2,-1) 7(2.2,-0.5) 8(2.2,0) 9(2.2,0.5) 10(2.2,1)
  silkscreen extent -2.9,-1.5 1.15,1.5, body extent -2.45,-1.5 2.45,1.5, height 1.1
SOT95P237X112-3N [mm]
  rrect25% 1.32x0.59 smd: 1(-1.015,0.95) 2(-1.015,-0.95) 3(1.015,0)
  silkscreen extent -2.35,-1.46 0.65,1.46, body extent -1.19,-1.46 1.19,1.46, height 1.12
SOT95P280X145-5N [mm]
  rrect50% 1.21x0.59 smd: 1(-1.255,0.95) 2(-1.255,0) 3(-1.255,-0.95) 4(1.255,-0.95) 5(1.255,0.95)
  silkscreen extent -2.51,-1.45 0.8,1.45, body extent -1.4,-1.45 1.4,1.45, height 1.45
WE-MAPI_4030 [mm] "SMT Shielded Power Inductor, body 4.10 x 4.10 mm"
  rect 0.98x3.7 smd: 1(-1.185,0) 2(1.185,0)
  Clean Signal Layer keep-out region: -0.695,1.85 0.695,1.85 0.695,-1.85 -0.695,-1.85
  silkscreen extent -2.15,-2.15 2.15,2.7, body extent -2.05,-2.05 2.05,2.05, height 3.1

## Part data
C1 C2 C14 C20 C27 C30 C31 C38 C39 C40: library part UUG1J101MNQ1MS
CR1 CR2: "Description"
D1: "SOT-23, 30V, 0.2A, Schottky Diode"
FL1 FL2: "1.5 kOhms @ 100MHz 1 Signal Line Ferrite Bead 0603 (1608 Metric) 500mA 500mOhm"
IC1 IC2: "Integrated Circuit"
J1: "USB-C (USB TYPE-C) USB 2.0 Receptacle Connector 24 (16+8 Dummy) Position Surface Mount, Right Angle"
J2: library part CMP-17439-000039-1, "CONN HEADER R/A 3POS 2MM"
NT1 NT2: library part NetTie_SMD, "Net Tie SMD"
R28: library part Resistor, "Resistor"
U2: "1 A/0.6 A, DC-to-DC Switching Regulator with Independent Positive and Negative Outputs"
U3: "âˆ’20V, 500mA, Ultralow Noise, Ultrahigh PSRR Negative Linear Regulator"
U7: "500-mA High-PSRR Low-IQ-Tief-Dropout-Spannungsregler mitablem"
U9: "SoundPlusâ„¢ Audio Operational Amplifier with High Performance, Low THD+N and Bipolar Input"

## Via types
v1: diameter 0.5, hole 0.2, Clean Signal Layer to Bottom Layer, 4 vias

## Nets (pads, with @x,y where several pads share a name; then routed paths per layer and width w, separated by ;. In a path a pad name is that pad's centre, name@x,y a point inside that pad or via, vN(x,y) a via of type N, cw(c..) or ccw(c..) an arc to the next point about the centre after c; other vN are vias at no path point)
+3.3V_ANA: C11.2 C35.1 IC1.1 IC1.10 IC1.12 IC1.13 IC1.15 IC1.27 R7.2 U5.9 U5.10
+3.3V_BTMOD: C12.2 R8.2 U6.9 U6.10
+10V_ANA: C19.2 C33.2 U4.9 U4.10 U9.2
-10V_ANA: C6.2 C34.2 U3.10 U3.11 U3.12 U9.4 U9.11 U9.12 U9.13 U9.14 U9.15
"ADP5070 EN1": U2.7 U8.40
"ADP5070 EN2": U2.9 U8.39
BTN_CENTER: D1.2 R45.1 U8.21
BTN_DOWN: R41.1 U8.25
BTN_LEFT: R42.1 U8.22
BTN_RIGHT: R43.1 U8.23
BTN_UP: R39.1 U8.24
DAC_MCLK: IC1.29 R52.2
DAC_ON/OFF: IC1.21 U8.10
DACL_OUT+: IC1.8 R46.1
DACL_OUT-: IC1.9 R40.1
DACR_OUT+: IC1.3 R44.1
DACR_OUT-: IC1.2 R38.1
GND: C1.2 C2.2 C3.2 C4.1 C5.1 C6.1 C7.1 C8.1 C9.1 C10.2 C11.1 C12.1 C13.2 C14.2 C15.1 C16.1 C17.1 C18.1 C19.1 C20.2 C21.2 C22.1 C23.1 C24.1 C26.1 C27.2 C29.2 C30.2 C31.2 C32.2 C33.1 C34.1 C35.2 C36.1 C37.1 C38.2 C39.2 C40.2 IC1.11 IC1.14 IC1.22 IC1.25 IC1.30 IC1.31 IC2.8 J1.A1/B12 J1.B1/A12 J1.S1 J1.S2 J1.S3 J1.S4 J2.1 L2.2 NT1.0 NT1.1 NT2.0 NT2.1 R1.1 R2.1 R6.1 R12.1 R13.1 R15.1 R16.1 R17.1 R19.1 R20.1 R21.1 R23.1 R24.1 R25.1 R27.1 R28.1 R30.1 R31.2 R49.1 R50.1 U1.8 U1.9 U1.19 U1.20 U2.2 U2.13 U2.19 U2.21 U3.9 U4.8 U4.11 U5.8 U5.11 U6.8 U6.11 U7.2 U8.12 U8.31 U8.47 U8.63 U9.3 | length 0.5
  Clean Signal Layer w0.254: 39.662,174.346 39.937,174.346 ; 39.764,180.919 39.937,180.746
I2C1_SCL_STM32: IC1.23 IC2.4 R34.2
I2C1_SDA_STM32: IC1.24 IC2.5 R32.2
I2S2_CK: IC1.20 R47.2
I2S2_SD: IC1.18 R37.1
I2S2_WS: IC1.19 R48.2
NetC5_2: C5.2 R5.1
NetC13_1: C13.1 R18.2 U2.12
NetC14_1: C14.1 U1.1
NetC15_2: C15.2 R12.2 U5.7
NetC16_2: C16.2 R13.2 U6.7
NetC17_2: C17.2 R14.1
NetC18_2: C18.2 R17.2 U4.7
NetC20_1: C20.1 J2.3 U1.5 U1.6
NetC21_1: C21.1 R18.1 R22.2 U2.11 U2.14
NetC23_2: C23.2 R27.2 U3.8
NetC25_1: C25.1 R29.1 R38.2 U9.10
NetC25_2: C25.2 C32.1 R29.2 U9.7
NetC27_1: C27.1 U8.7
NetC28_1: C28.1 R33.1 R40.2 U9.6
NetC28_2: C28.2 C29.1 R33.2 U9.9
NetC30_1: C30.1 C31.1 FL1.2 U8.13
NetC36_2: C36.2 R46.2 R49.2 U9.5
NetC37_2: C37.2 R44.2 R50.2 U9.1
NetC39_1: C39.1 C40.1 FL2.2 IC2.1 IC2.7
NetCR1_2: CR1.2 L1.2 U2.20
NetCR2_1: CR2.1 L2.1 U2.18
NetD1_3: D1.3 R30.2 U7.3
NetIC2_2: IC2.2 X1.2
NetIC2_3: IC2.3 X1.1
NetIC2_6: IC2.6 R52.1
NetIC2_10: IC2.10 R51.1
NetJ1_A5: J1.A5 R1.2
NetJ1_B5: J1.B5 R2.2
NetJ2_2: J2.2 R9.1
NetJ3_1: J3.1 R39.2
NetJ3_2: J3.2 R41.2
NetJ3_3: J3.3 R42.2
NetJ3_5: J3.5 R43.2
NetJ3_6: J3.6 R45.2
NetL1_1: L1.1 U2.1
NetR3_1: R3.1 R4.1
NetR4_2: R4.2 R25.2 U2.5
NetR5_2: R5.2 U2.6
NetR6_2: R6.2 U2.8
NetR7_1: R7.1 R23.2 U5.6
NetR8_1: R8.1 R24.2 U6.6
NetR9_2: R9.2 U1.12
NetR10_2: R10.2 U5.4
NetR11_2: R11.2 U6.4
NetR14_2: R14.2 U2.10
NetR15_2: R15.2 U4.5
NetR16_2: R16.2 U1.13
NetR19_2: R19.2 U5.5
NetR20_2: R20.2 U6.5
NetR21_2: R21.2 U3.6
NetR22_1: R22.1 R26.1
NetR28_2: R28.2 U1.14
NetR31_1: R31.1 U8.60
NetR32_1: R32.1 R35.2 U8.59
NetR34_1: R34.1 R36.2 U8.58
NetR37_2: R37.2 U8.11
NetR47_1: R47.1 U8.34
NetR48_1: R48.1 U8.33
OPA1622_EN: IC1.7 U9.8
OTG_FS_DM: J1.A7 J1.B7 U8.44
OTG_FS_DP: J1.A6 J1.B6 U8.45
PWR_HOLD: D1.1 U8.20
STM32_CLK_IN: R51.2 U8.5
STM32_VDD: C24.2 C38.1 FL1.1 FL2.1 R35.1 R36.1 U7.5 U8.1 U8.19 U8.32 U8.48 U8.49 U8.64
V_SYS: C1.1 C2.1 C8.2 C9.2 C10.1 C26.2 J3.4 R10.1 R11.1 U1.15 U1.16 U1.17 U2.15 U2.16 U2.17 U5.1 U5.2 U5.3 U6.1 U6.2 U6.3 U7.1
VBST_NEG: C4.2 C22.2 CR2.2 R26.2 U3.1 U3.2 U3.3 U3.5 U3.13
VBST_POS: C3.1 C7.2 CR1.1 R3.2 U4.1 U4.2 U4.3 U4.6
VBUS_C: J1.A4/B9 J1.B4/A9 U1.4
pads on no net: IC1.4 IC1.5 IC1.6 IC1.16 IC1.17 IC1.26 IC1.28 IC2.9 J1. J1.A8 J1.B8 U1.2 U1.3 U1.7 U1.10 U1.11 U1.18 U1.21 U2.3 U2.4 U3.4 U3.7 U4.4 U7.4 U8.2 U8.3 U8.4 U8.6 U8.8 U8.9 U8.14 U8.15 U8.16 U8.17 U8.18 U8.26 U8.27 U8.28 U8.29 U8.30 U8.35 U8.36 U8.37 U8.38 U8.41 U8.42 U8.43 U8.46 U8.50 U8.51 U8.52 U8.53 U8.54 U8.55 U8.56 U8.57 U8.61 U8.62 X1.3 X1.4
copper on no net: | length 520.6
  Clean Signal Layer w0.254: 27.94,193.421 54.864,193.421 54.864,166.37 28.448,166.37 28.194,166.624 28.194,193.167 ; 63.754,166.751 122.682,166.751 122.682,202.184 63.754,202.184 63.754,166.751 ; 125.603,165.862 192.405,165.862 192.405,211.328 125.603,211.328 125.603,165.862
  other v1: 83.947,188.463 83.172,189.738 84.722,189.738 83.947,191.013

## Text inside footprints (layer, text, board x,y; h text height)
CR1: Top Silkscreen Layer "*" at 112.671,131.636 h1.27 r90; Mechanical 13 "*" at 112.671,132.931 h1.27 r90
CR2: Top Silkscreen Layer "*" at 115.516,131.636 h1.27 r90; Mechanical 13 "*" at 115.516,132.931 h1.27 r90
J3: Top Silkscreen Layer "SKQUAAx010" at 120.534,178.261 h1.02 r90
U2: Mechanical 13 "*" at 147.282,185.408 h1.27